# Altium PCB GSB-01-V00.PcbDoc
Units mm, origin at the board's own origin, x right, y up, seen from the top; angles counter-clockwise.
Board outline 152.4 x 101.6 mm, 2 copper layers (Top Layer, Bottom Layer); 42 components, 28 nets, 159 pads, 0 vias.
Unrouted connection lines stored in the file: 100.
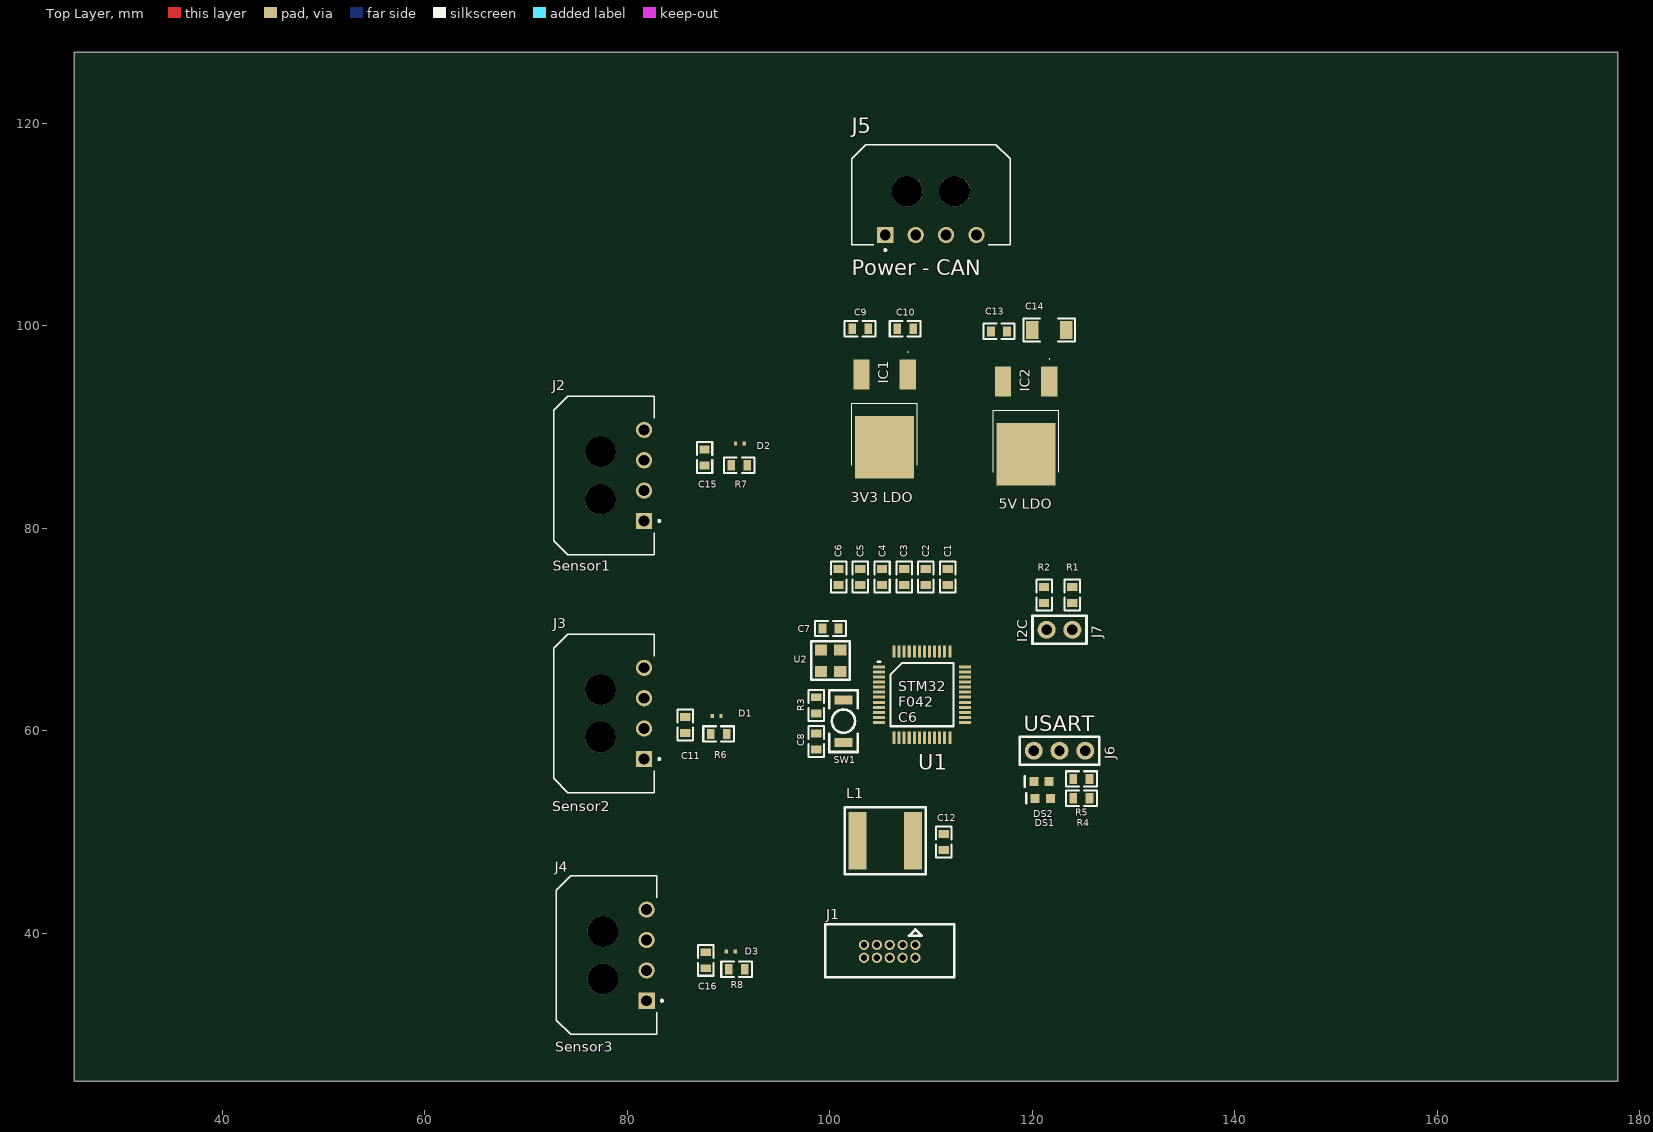
[diagram p0: Top Layer view]
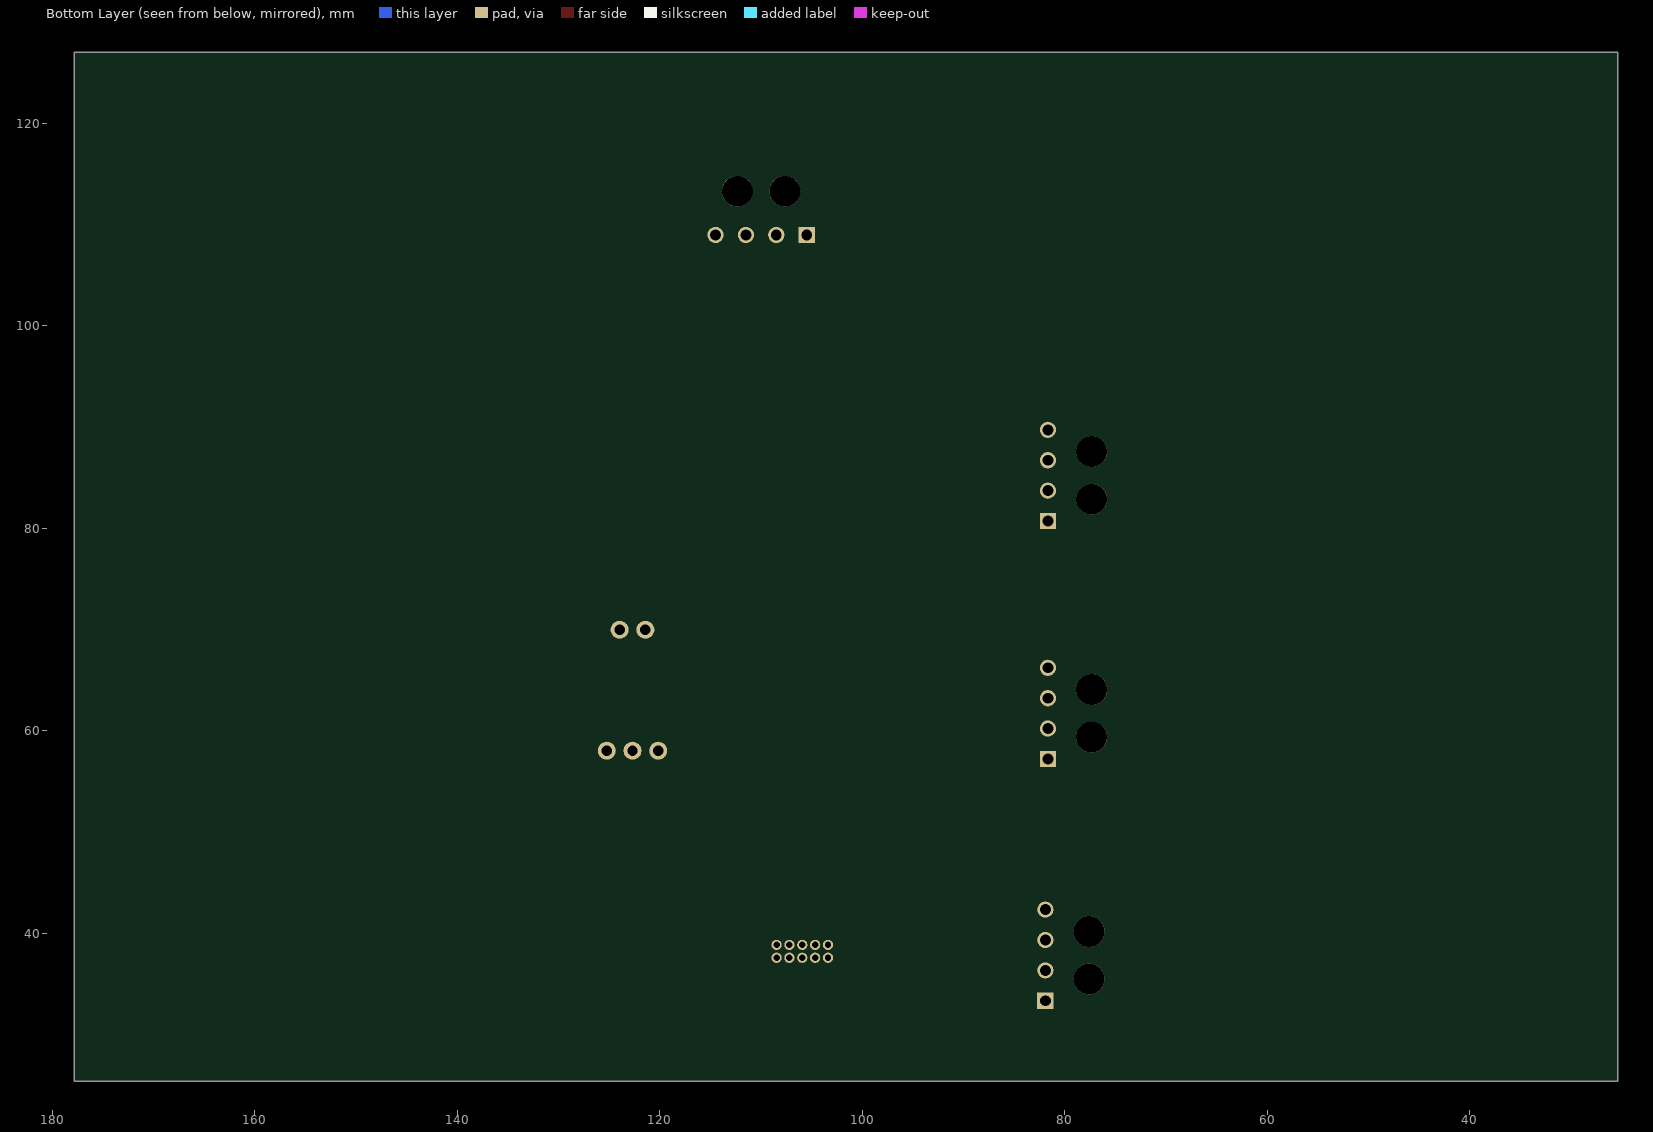
[diagram p1: Bottom Layer view, seen from below]

## Layer stack, top to bottom
Top Solder: solder mask 0.0102, Solder Resist, Dk 3.5
Top Layer: signal copper 0.0356
Dielectric 1: dielectric 0.32, FR-4, Dk 4.8
Bottom Layer: signal copper 0.0356
Bottom Solder: solder mask 0.0102, Solder Resist, Dk 3.5

## Board outline
25.4,25.4 177.8,25.4 177.8,127 25.4,127

## Design rules (kind name [scope] priority, off if disabled: settings)
Clearance [All] p1: gap=0.3 ignorepadtopadclearanceinfootprint=FALSE
PolygonConnect [All] p1: connectstyle=Relief reliefconductorwidth=0.254 reliefentries=4 polygonreliefangle="90 Angle" airgapwidth=0.254
RoutingVias [All] p1: holewidth=0.3 width=0.6 viastyle="Through Hole" minholewidth=0.3 minwidth=0.6 maxholewidth=0.3 maxwidth=0.6
SolderMaskExpansion [All] p1: expansion=0.102 istentingtop=FALSE
Width [All] p1: maxlimit=1 minlimit=0.3 preferedwidth=0.5
30 further rules are at their usual default settings.

## Classes and differential pairs
component class BMS-S04-V00-Microcontroller_1: J6 J7

## Components (designator, comment, footprint, x,y, rotation, side; value= is the part's Value field where it differs from the comment)
C1 "100nF 50V 5% X7R 0603" Cap_Ceramic_0603 111.633,75.184 r90 top
C2 "4u7 50V 5% X7R 0603" Cap_Ceramic_0603 109.474,75.184 r90 top
C3 "100nF 50V 5% X7R 0603" Cap_Ceramic_0603 107.347,75.184 r90 top
C4 "4u7 50V 5% X7R 0603" Cap_Ceramic_0603 105.156,75.184 r90 top
C5 "100nF 50V 5% X7R 0603" Cap_Ceramic_0603 102.997,75.184 r90 top
C6 "4u7 50V 5% X7R 0603" Cap_Ceramic_0603 100.869,75.184 r90 top
C7 "100nF 50V 5% X7R 0603" Cap_Ceramic_0603 100.076,70.104 r180 top
C8 "100nF 50V 5% X7R 0603" Cap_Ceramic_0603 98.658,58.953 r270 top
C9 "100nF 50V 5% X7R 0603" Cap_Ceramic_0603 102.997,99.695 r180 top
C10 "10nF 50V 20% X7R 0603" Cap_Ceramic_0603 107.442,99.695 r0 top
C11 "100nF 50V 5% X7R 0603" Cap_Ceramic_0603 85.725,60.579 r270 top
C12 "100nF 50V 5% X7R 0603" Cap_Ceramic_0603 111.252,49.022 r90 top
C13 "100nF 50V 5% X7R 0603" Cap_Ceramic_0603 116.713,99.441 r180 top
C14 "22uF 35V 20% X5R 1206" Cap_Ceramic_1206 121.666,99.568 r0 top
C15 "100nF 50V 5% X7R 0603" Cap_Ceramic_0603 87.63,86.995 r270 top
C16 "100nF 50V 5% X7R 0603" Cap_Ceramic_0603 87.757,37.338 r270 top
D1 "ESD9B3.3ST5G" SOD-923 89.267,61.468 r90 top
D2 "ESD9B3.3ST5G" SOD-923 91.567,88.392 r90 top
D3 "ESD9B3.3ST5G" SOD-923 90.664,38.227 r90 top
DS1 "LED Orange 0603" "LED ORANGE 0603" 121.031,53.34 r180 top
DS2 "LED Orange 0603" "LED ORANGE 0603" 120.904,54.991 r180 top
IC1 "3V3 LDO" NCV4274CDT50RKG 105.41,86.233 r90 top
IC2 "5V LDO" NCV4274CDT50RKG 119.379,85.538 r90 top
J1 "IDC 10P 2x5 1.27mm" "IDC 1.27MM 10P" 105.918,38.227 r180 top
J2 "Sensor1" MOLEX_0436500400 77.343,85.217 r270 top
J3 "Sensor2" MOLEX_0436500400 77.343,61.722 r270 top
J4 "Sensor3" MOLEX_0436500400 77.597,37.846 r270 top
J5 "Power - CAN" MOLEX_0436500400 109.982,113.284 r180 top
J6 "USART" Jumper_3Way_Pin 122.682,58.039 r180 top
J7 "I2C" Jumper_2Way_Pin 123.952,69.977 r0 top
L1 "74404064221" Inductor_6x6mm 105.41,49.149 r0 top
R1 "2k2 5% 0603" Res_ThinFilm_0603 123.952,73.406 r90 top
R2 "2k2 5% 0603" Res_ThinFilm_0603 121.158,73.406 r90 top
R3 "4k7 5% 0603" Res_ThinFilm_0603 98.658,62.509 r90 top
R4 "330R 5% 0603" Res_ThinFilm_0603 124.841,53.34 r0 top
R5 "330R 5% 0603" Res_ThinFilm_0603 124.841,55.245 r0 top
R6 "10k 1% 0603" Res_ThinFilm_0603 89.027,59.69 r0 top
R7 "10k 1% 0603" Res_ThinFilm_0603 91.059,86.233 r0 top
R8 "10k 1% 0603" Res_ThinFilm_0603 90.805,36.449 r0 top
SW1 "B3U-1000P" "BTN B3U-1000P" 101.346,60.96 r90 top
U1 "STM32F042C6" STM32F042C6 104.847,66.318 r0 top
U2 "DSC1001DI1-008.0000T" DSC1001DI1-008.0000TCT-ND 100.076,66.929 r0 top

## Footprints (in the part's own frame and the unit in brackets; to place one, negate y for a bottom-side part, rotate by r counter-clockwise, add the part's x,y. Pads: shape width x height; smd on the part's side, far side on the other; paste and mask are expansions set on the pad)
"BTN B3U-1000P" [mil] "OMRON B3U-1000P"
  rect 35x70 smd: 1(-82.68,0) 2(82.68,0)
  silkscreen extent -120,-55 120,55, body extent -79,-49 79,49, height 63
Cap_Ceramic_0603 [mil]
  rect 30x40 smd: 1(-31.24,0) 2(31.24,0)
  silkscreen extent -60,-30 60,30, body extent -31,-16 32,16, height 33
Cap_Ceramic_1206 [mil]
  rect 47x71 smd: 1(-66.08,0) 2(66.08,0)
  silkscreen extent -100,-45 100,45, body extent -63,-31 63,32, height 53
DSC1001DI1-008.0000TCT-ND [mm]
  rect 1.219x1.092 smd: 1(-0.95,1.05) 2(0.95,1.05) 3(0.95,-1.05) 4(-0.95,-1.05)
  silkscreen extent -1.91,-1.91 1.91,1.91, body extent -1.25,-1.6 1.25,1.6, height 0.85
"IDC 1.27MM 10P" [mil]
  round 40 hole 25: 1(-100,-25) 2(-100,25) 3(-50,-25) 4(-50,25) 5(0,-25) 6(0,25) 7(50,-25) 8(50,25) 9(100,-25) 10(100,25)
  silkscreen extent -250,-105 250,100, body extent -249,-104 249,100, height 214
Inductor_6x6mm [mm]
  rect 1.8x5.7 smd: 1(-2.667,0) 2(2.794,0)
  silkscreen extent -3.94,-3.3 4.06,3.3, body extent -3,-3 3,3, height 4.56
Jumper_2Way_Pin [mil]
  round 70 hole 40: 1(-100,0) 2(0,0)
  silkscreen extent -155,-55 55,55, body extent -142,-48 42,47, height 332
Jumper_3Way_Pin [mil]
  round 70 hole 40: 1(-100,0) 2(0,0) 3(100,0)
  silkscreen extent -155,-55 155,55, body extent -142,-48 142,47, height 332
"LED ORANGE 0603" [mil]
  rect 35x35 smd: 1(-30,0) 2(30,0)
  silkscreen extent 65,-20 65,20, body extent -40,-20 40,20, height 30
MOLEX_0436500400 [mm]
  rect 1.605x1.605 hole 1.07: 1(4.5,4.32)
  round 1.605 hole 1.07: 2(1.5,4.32) 3(-1.5,4.32) 4(-4.5,4.32)
  round 3.05 hole 3.05 unplated: ""(-2.35,0) ""(2.35,0)
  silkscreen extent -7.83,-4.6 7.83,5.92, body extent -7.82,-4.95 7.83,4.95, height 3.14
NCV4274CDT50RKG [mm]
  rect 3x1.6 smd: 1(8.95,-2.285) 3(8.95,2.285)
  rect 6.2x5.8 smd: 2(1.77,0)
  silkscreen extent 0,-3.25 11.22,3.25
Res_ThinFilm_0603 [mil]
  rect 30x40 smd: 1(-31.24,0) 2(31.24,0)
  silkscreen extent -60,-30 60,30, body extent -31,-16 32,16, height 18
SOD-923 [mm]
  rect 0.4x0.325 smd: 1(0,0.875) 2(0,0)
STM32F042C6 [mm]
  rect 1.2x0.3 smd: 1(0,0) 2(0,-0.5) 3(0,-1) 4(0,-1.5) 5(0,-2) 6(0,-2.5) 7(0,-3) 8(0,-3.5) 9(0,-4) 10(0,-4.5) 11(0,-5) 12(0,-5.5) 25(8.5,-5.5) 26(8.5,-5) 27(8.5,-4.5) 28(8.5,-4) 29(8.5,-3.5) 30(8.5,-3) 31(8.5,-2.5) 32(8.5,-2) 33(8.5,-1.5) 34(8.5,-1) 35(8.5,-0.5) 36(8.5,0)
  rect 0.3x1.2 smd: 13(1.5,-7) 14(2,-7) 15(2.5,-7) 16(3,-7) 17(3.5,-7) 18(4,-7) 19(4.5,-7) 20(5,-7) 21(5.5,-7) 22(6,-7) 23(6.5,-7) 24(7,-7) 37(7,1.5) 38(6.5,1.5) 39(6,1.5) 40(5.5,1.5) 41(5,1.5) 42(4.5,1.5) 43(4,1.5) 44(3.5,1.5) 45(3,1.5) 46(2.5,1.5) 47(2,1.5) 48(1.5,1.5)
  silkscreen extent -0.13,-5.86 7.36,0.51, body extent -0.27,-7.26 8.76,1.77, height 1.5

## Part data
C1 C3 C5 C7 C8 C9 C11 C12 C13 C15 C16: "Capacitor, Ceramic, SMD, 100nF, 50V, 5%, X7R, 0603"
C2 C4 C6: "Capacitor, Ceramic, SMD, 4u7, 50V, 5%, X7R, 0603"
C10: "10000pF ±20% 50V Ceramic Capacitor X7R 0603 (1608 Metric)", ComponentLink1Description=Digikey, ComponentLink1URL=https://www.digikey.com.au/product-detail/en/kemet/C0603C103M5RACTU/399-7842-1-ND/3471565, ComponentLink2Description=Datasheet, ComponentLink2URL=https://content.kemet.com/datasheets/KEM_C1002_X7R_SMD.pdf
C14: "22µF ±20% 35V Ceramic Capacitor X5R 1206 (3216 Metric)", ComponentLink1Description=Digikey, ComponentLink1URL=https://www.digikey.com.au/product-detail/en/tdk-corporation/C3216X5R1V226M160AC/445-8045-1-ND/2792165, ComponentLink2Description=Datasheet, ComponentLink2URL=https://product.tdk.com/info/en/catalog/datasheets/mlcc_commercial_general_en.pdf
D1 D2 D3: "11.5V Clamp 2A (8/20µs) Ipp Tvs Diode Surface Mount SOD-923", Manufacturer="ON Semiconductor", ComponentLink1Description=Digikey, ComponentLink1URL=https://www.digikey.com.au/product-detail/en/on-semiconductor/ESD9B3.3ST5G/ESD9B3.3ST5GOSCT-ND/2704995, ComponentLink2Description=Datasheet, ComponentLink2URL=https://www.onsemi.cn/pub/Collateral/ESD9B-D.PDF, MPN=ESD9B3.3ST5G
DS1 DS2: library part "LED ORANGE 0603"
IC1 IC2: library part NCV4274CDT50RKG, "Integrated Circuit", Manufacturer_Name="ON Semiconductor", Mouser Part Number=863-NCV4274CDT50RKG, Arrow Part Number=NCV4274CDT50RKG, Arrow Price/Stock=https://www.arrow.com/en/products/ncv4274cdt50rkg/on-semiconductor, Datasheet Link=https://www.onsemi.com/pub/Collateral/NCV4274C-D.PDF, Height=2.38mm, Manufacturer_Part_Number=NCV4274CDT50RKG, Mouser Price/Stock=https://www.mouser.co.uk/ProductDetail/ON-Semiconductor/NCV4274CDT50RKG?qs=tCMd4XlZ%2FiBk5MdmOBr7cw%3D%3D
J2 J3 J4 J5: library part 0436500400, "Micro-fit 3.0 Connector, 4 Circuit Single Row, Right Angle Throughhole PCB, Snap-In Peg", Package=None, Availability=Unavailable, ComponentLink1Description=Snapeda, ComponentLink1URL=https://www.snapeda.com/parts/0436500400/Molex/view-part/1776823/?ref=eda, MF=Molex, MP=0436500400, Price=None, SnapEDA_Link=https://www.snapeda.com/parts/0436500400/Molex/view-part/1776823/?ref=snap
J6: library part "Jumper 3Way Side Pins", "Jumper 3Way Side Pins"
J7: library part "Jumper 2Way Side Pins", "Jumper 2Way Side Pins"
L1: "FIXED IND 220UH 660MA 850 MOHM", ComponentLink1Description=Digikey, ComponentLink1URL=https://www.digikey.com.au/product-detail/en/w%C3%BCrth-elektronik/74404064221/732-7261-1-ND/5353241, ComponentLink2Description="LCSC A", ComponentLink2URL=https://lcsc.com/product-detail/Power-Inductors_Sunlord-SWPA6045S221MT_C91047.html, ComponentLink3Description="LCSC B", ComponentLink3URL=https://lcsc.com/product-detail/Power-Inductors_SXN-Shun-Xiang-Nuo-Elec-SMNR6045-221MT_C467145.html
R1 R2: "Resistor, SMD, 2k2, 0.1W, 5%, 0603"
R3: "Resistor, SMD, 4k7, 0.1W, 5%, 0603"
R4 R5: "Resistor, SMD, 330R, 0.1W, 5%, 0603"
R6 R7 R8: "Resistor, SMD, 10k, 0.1W, 1%, 0603"
SW1: library part "BTN B3U-1000P", "Omron B3U-1000P Ultra Miniture Switch", ComponentLink1Description=LCSC, ComponentLink1URL=https://lcsc.com/product-detail/Tactile-Switches_BRIGHT-TSA063G50-250_C294565.html
U1: library part STM32042C6, "ARM® Cortex®-M0 STM32F0 Microcontroller IC 32-Bit 48MHz 32KB (32K x 8) FLASH 48-LQFP (7x7)", ComponentLink1Description=Digikey, ComponentLink1URL=https://www.digikey.com.au/product-detail/en/stmicroelectronics/STM32F042C6T6TR/497-19319-1-ND/10063344, ComponentLink2Description=Datasheet, ComponentLink2URL=https://www.st.com/resource/en/datasheet/stm32f042k6.pdf
U2: "8MHz XO (Standard) CMOS Oscillator 1.8 ~ 3.3V Standby (Power Down) 4-SMD, No Lead"

## Nets (pads, with @x,y where several pads share a name; then routed paths per layer and width w, separated by ;. In a path a pad name is that pad's centre, name@x,y a point inside that pad or via, vN(x,y) a via of type N, cw(c..) or ccw(c..) an arc to the next point about the centre after c; other vN are vias at no path point)
3V3: C1.2 C2.2 C3.2 C4.2 C5.2 C6.2 C7.2 C10.2 IC1.3 J1.1 J2.1 J3.1 J4.1 L1.1 R1.2 R2.2 R3.2 R4.2 R5.2 U1.1 U1.24 U1.36 U1.48 U2.1 U2.4
5V: C14.2 IC2.3 J2.3 J3.3 J4.3
12V: C9.2 C13.2 IC1.1 IC2.1 J5.1
"CAN RX": J5.2 U1.32
"CAN TX": J5.3 U1.33
"CELL ALERT": U1.22
CHG: U1.45
DSG: U1.46
GND: C1.1 C2.1 C3.1 C4.1 C5.1 C6.1 C7.1 C8.1 C9.1 C10.1 C11.1 C12.1 C13.1 C14.1 C15.1 C16.1 D1.1 D2.1 D3.1 IC1.2 IC2.2 J1.3 J1.5 J1.9 J2.4 J3.4 J4.4 J5.4 J6.1 SW1.1 U1.6 U1.8 U1.23 U1.35 U1.47 U2.2
"I2C1 SCL": J7.2 R1.1 U1.42
"I2C1 SDA": J7.1 R2.1 U1.43
LED0: DS1.2 U1.27
LED1: DS2.2 U1.28
NetC11_2: C11.2 R6.1 U1.39
NetC12_2: C12.2 L1.2 U1.9
NetC15_2: C15.2 R7.1 U1.38
NetC16_2: C16.2 R8.1 U1.13
NetD1_2: D1.2 J4.2 R6.2
NetD2_2: D2.2 J2.2 R7.2
NetD3_2: D3.2 J3.2 R8.2
NetDS1_1: DS1.1 R4.1
NetDS2_1: DS2.1 R5.1
NRST: C8.2 J1.10 R3.1 SW1.2 U1.7
"OSC IN": U1.5 U2.3
SWCLK: J1.4 U1.37
SWDIO: J1.2 U1.34
"USART1 RX": J6.2 U1.31
"USART1 TX": J6.3 U1.30
pads on no net: J1.6 J1.7 J1.8 J2. J3. J4. J5. U1.2 U1.3 U1.4 U1.10 U1.11 U1.12 U1.14 U1.15 U1.16 U1.17 U1.18 U1.19 U1.20 U1.21 U1.25 U1.26 U1.29 U1.40 U1.41 U1.44

## Text inside footprints (layer, text, board x,y; h text height)
U1: Top Overlay "STM32 / F042 / C6" at 106.752,60.852 h1.02